# Altium PCB PCB1.pcbdoc
Units mil, origin at the board's own origin, x right, y up, seen from the top; angles counter-clockwise.
Board outline 1811.02 x 2047.24 mil, 2 copper layers (Top Layer, Bottom Layer), stack 38.583 mil thick; 38 components, 29 nets, 139 pads, 37 vias.
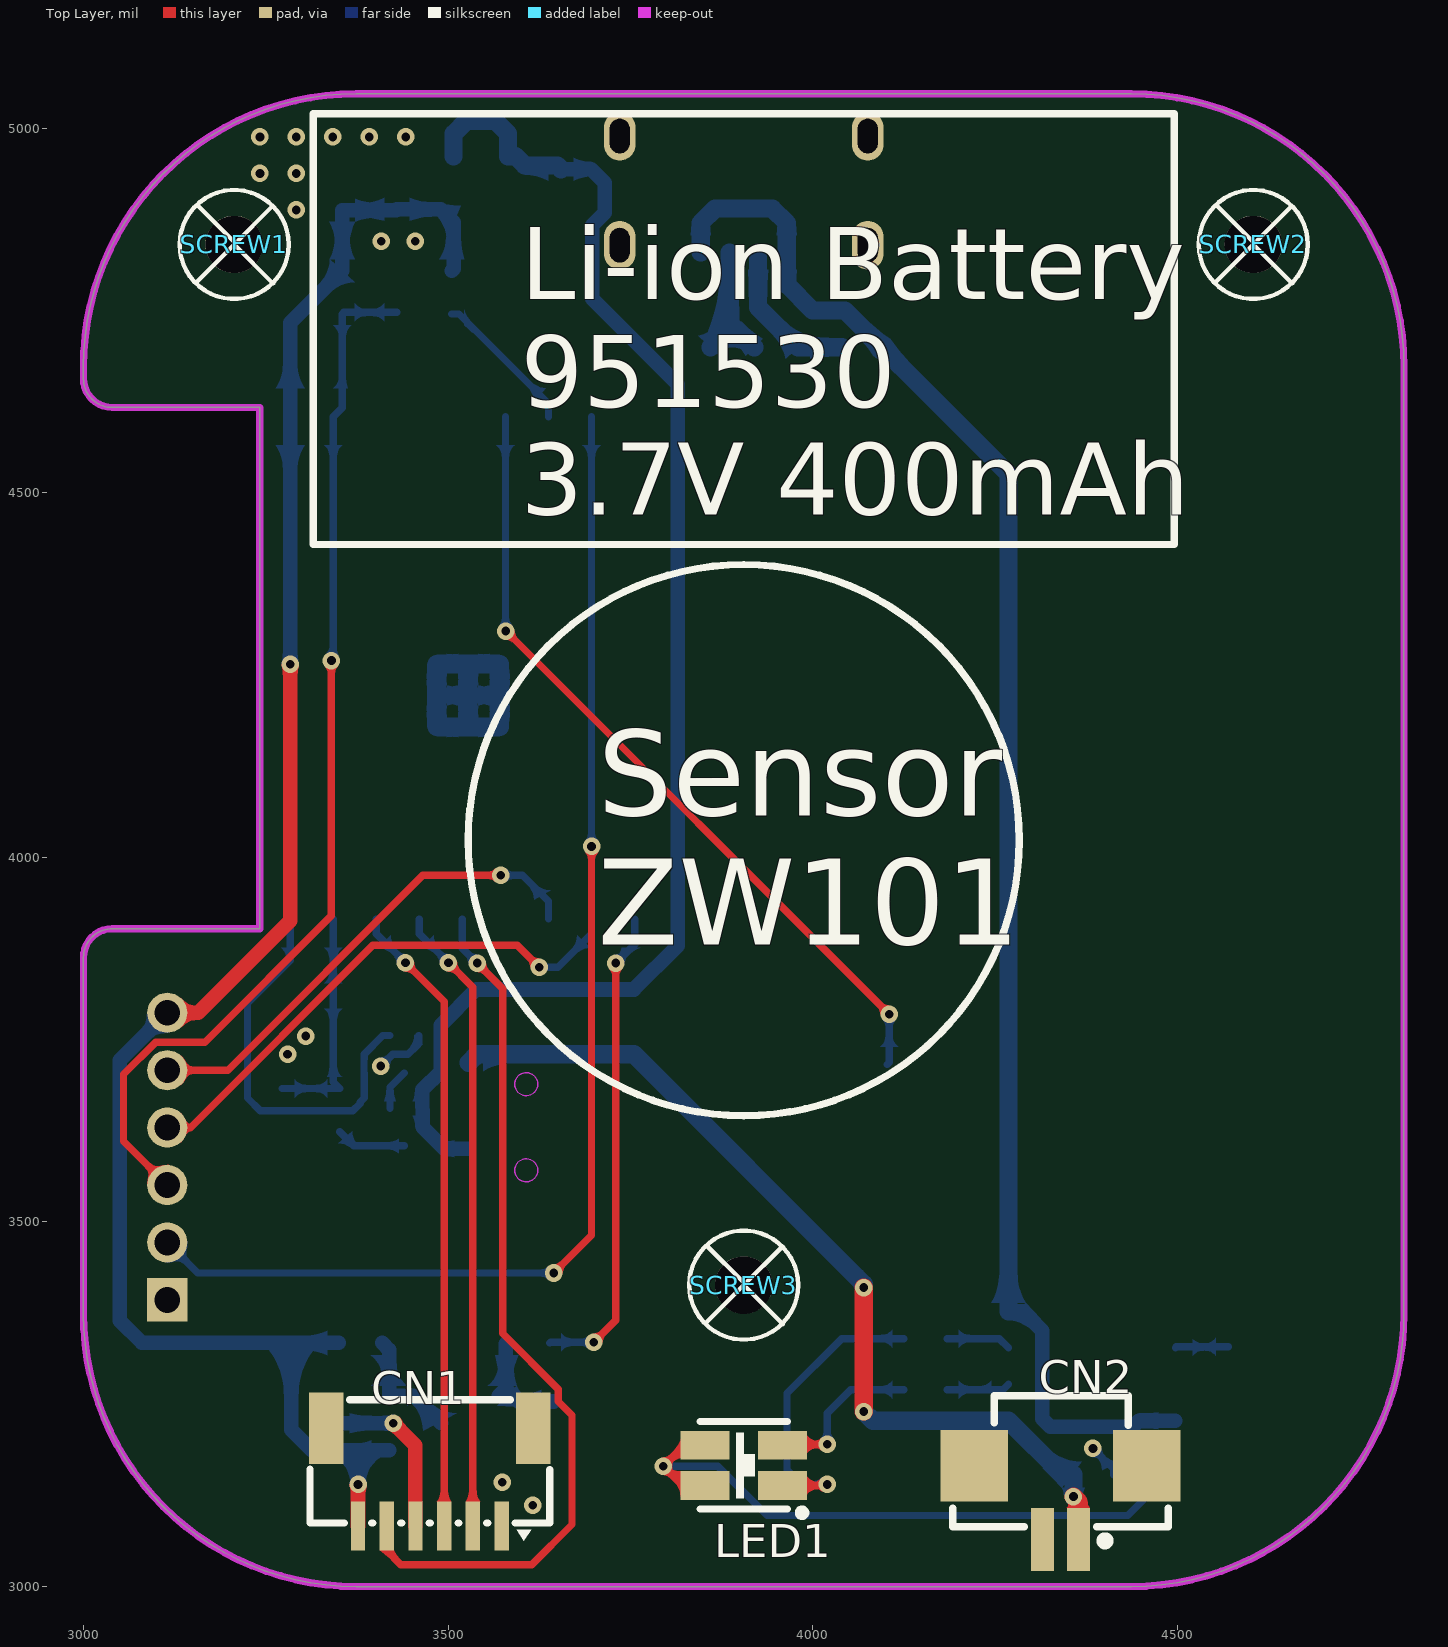
[diagram p0: Top Layer view]
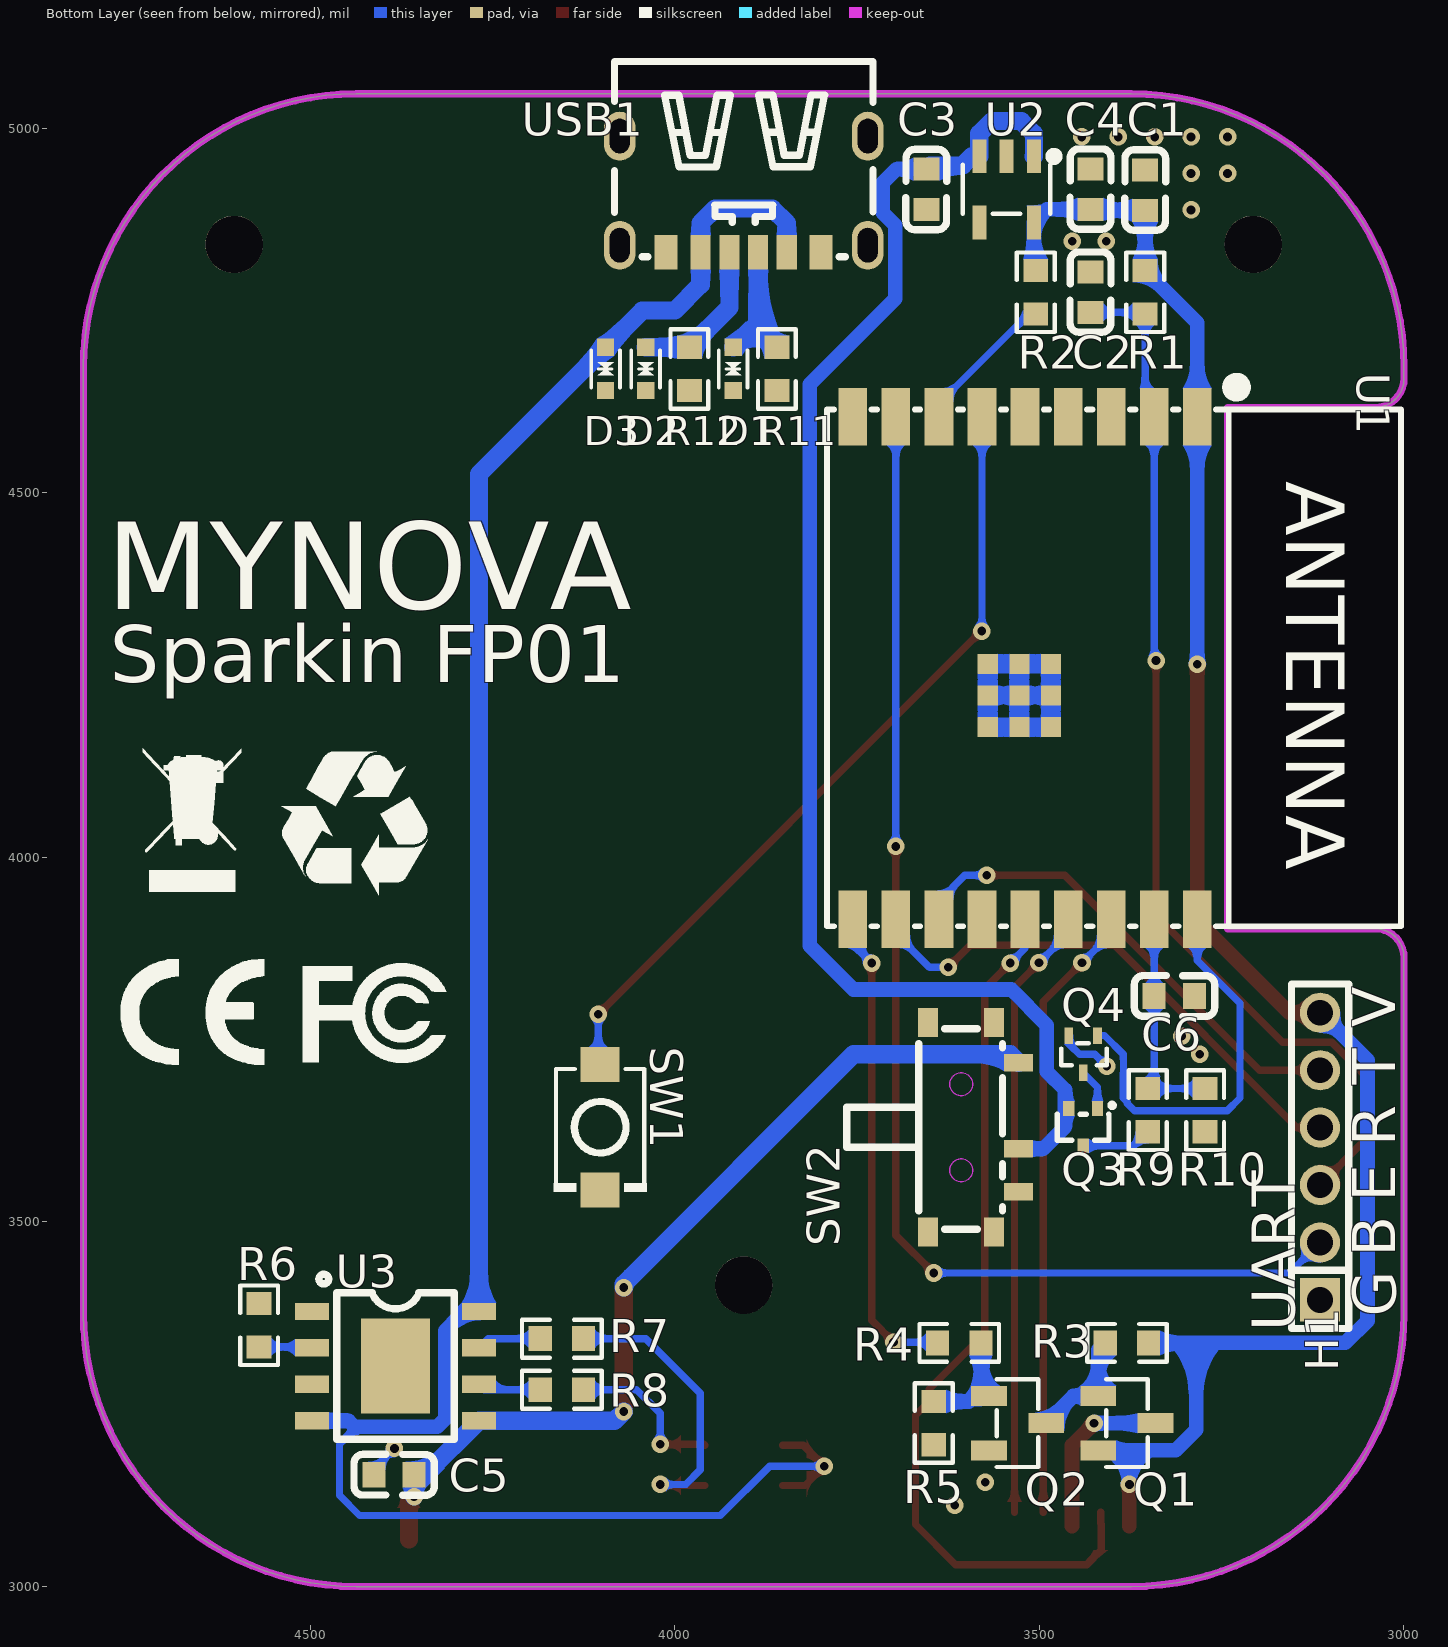
[diagram p1: Bottom Layer view, seen from below]

## Layer stack, top to bottom
Top Solder Mask Layer: solder mask 0.394, Dk 3.3
Top Layer: signal copper 1.378
Dielectric1: surface 35.827, FR4, Dk 4.5
Bottom Layer: signal copper 1.378
Bottom Solder Mask Layer: solder mask 0.394, Dk 3.3

## Board outline
3000,3374.02 ccw(c3374.02,3374.02) 3374.02,3000 4437.01,3000 ccw(c4437.01,3374.02) 4811.02,3374.02 4811.02,4673.23 ccw(c4437.01,4673.23) 4437.01,5047.24 3374.02,5047.24 ccw(c3374.02,4673.23) 3000,4673.23 3000,4656.47 ccw(c3039.37,4656.47) 3039.37,4617.1 3241.93,4617.1 3241.93,3902.15 3039.37,3902.15 ccw(c3039.37,3862.78) 3000,3862.78

## Design rules (kind name [scope] priority, off if disabled: settings)
BoardOutlineClearance copperThickness1oz [All] p0: genericclearance=10 ignorepadtopadclearanceinfootprint=FALSE except(0: Arc-SplitContinuation Track-SplitContinuation SMDPad-SplitContinuation THPad-SplitContinuation Via-SplitContinuation Fill-SplitContinuation Poly-SplitContinuation Region-SplitContinuation Text-SplitContinuation)
BoardOutlineClearance copperThickness2oz [All] p0: genericclearance=10 ignorepadtopadclearanceinfootprint=FALSE except(0: Arc-SplitContinuation Track-SplitContinuation SMDPad-SplitContinuation THPad-SplitContinuation Via-SplitContinuation Fill-SplitContinuation Poly-SplitContinuation Region-SplitContinuation Text-SplitContinuation)
BoardOutlineClearance Plane_innerPlane [All] p0: genericclearance=10 ignorepadtopadclearanceinfootprint=FALSE except(0: Arc-SplitContinuation Track-SplitContinuation SMDPad-SplitContinuation THPad-SplitContinuation Via-SplitContinuation Fill-SplitContinuation Poly-SplitContinuation Region-SplitContinuation Text-SplitContinuation)
BoardOutlineClearance Copper_copperRegion [All] p0: genericclearance=10 ignorepadtopadclearanceinfootprint=FALSE except(0: Arc-SplitContinuation Track-SplitContinuation SMDPad-SplitContinuation THPad-SplitContinuation Via-SplitContinuation Fill-SplitContinuation Poly-SplitContinuation Region-SplitContinuation Text-SplitContinuation)
BoardOutlineClearance otherClearance [All] p0: genericclearance=10 ignorepadtopadclearanceinfootprint=FALSE except(0: Arc-SplitContinuation Track-SplitContinuation SMDPad-SplitContinuation THPad-SplitContinuation Via-SplitContinuation Fill-SplitContinuation Poly-SplitContinuation Region-SplitContinuation Text-SplitContinuation)
Clearance copperThickness1oz [All] p1: gap=7 ignorepadtopadclearanceinfootprint=FALSE
Clearance copperThickness2oz [All] p1: gap=7 ignorepadtopadclearanceinfootprint=FALSE
Clearance Plane_innerPlane [All] p1: gap=7 ignorepadtopadclearanceinfootprint=FALSE
Clearance Copper_copperRegion [All] p1: gap=7 ignorepadtopadclearanceinfootprint=FALSE
Clearance otherClearance [All] p1: gap=7 ignorepadtopadclearanceinfootprint=FALSE
DiffPairsRouting differentialPair [All] p1: maxuncoupledlength=10 minlimit=5.9843 maxlimit=Infinity mostfreqgap=5.9843 toplayer_minwidth=5 toplayer_prefwidth=10 toplayer_maxwidth=100 bottomlayer_minwidth=5 bottomlayer_prefwidth=10 bottomlayer_maxwidth=100
PasteMaskExpansion pasteMaskExpansion [All] p1: expansion=0
PlaneConnect innerPlane [All] p1: planeconnectstyle=Relief reliefexpansion=20 reliefentries=4 reliefconductorwidth=10 reliefairgap=10
PolygonConnect copperRegion [All] p1: connectstyle=Direct reliefentries=4 reliefconductorwidth=10 polygonreliefangle="90 Angle" airgapwidth=10
RoutingVias viaSize [All] p1: viastyle="Through Hole" holewidth=12.0078 minholewidth=11.811 maxholewidth=248.0314 width=12.0078 minwidth=11.811 maxwidth=248.0314
SolderMaskExpansion solderMaskExpansion [All] p1: useseparateexpansions=TRUE expansion=2.0079 expansionbottom=2.0079
Width copperThickness1oz [All] p1: maxlimit=100 minlimit=5 preferedwidth=10
Width copperThickness2oz [All] p1: maxlimit=100 minlimit=8 preferedwidth=10

## Components (designator, comment, footprint, x,y, rotation, side; value= is the part's Value field where it differs from the comment)
C1 "" C0603 3355,4915 r270 bottom
C2 "" C0603 3430,4775 r270 bottom
C3 "" C0603 3655,4916.28 r90 bottom
C4 "" C0603 3430,4916.28 r270 bottom
C5 "" C0603 4385.18,3153.34 r0 bottom
C6 "" C0603 3315,3810 r0 bottom
CN1 "" CONN-SMD_6P-P1.00_MEGASTAR_ZX-SH1.0-6PWT 3475,3150 r180 top
CN2 "" CONN-SMD_2P-P1.25-HC-1.25-2PWT 4340,3115 r180 top
D1 "" SOD-523_L1.2-W0.8-LS1.6-BI 3920,4670 r270 bottom
D2 "" SOD-523_L1.2-W0.8-LS1.6-BI 4040,4670 r270 bottom
D3 "" SOD-523_L1.2-W0.8-LS1.6-BI 4095,4670 r270 bottom
H1 "" ? 3115,3590 r90 bottom
LED1 "" LED-SMD_4P-L3.2-W2.7-TL 3905.51,3166.22 r180 top
Q1 "" SOT-23-3_L2.9-W1.3-P1.90-LS2.4-BR 3379.97,3224.08 r0 bottom
Q2 "" SOT-23-3_L2.9-W1.3-P1.90-LS2.4-BR 3529.97,3224.08 r0 bottom
Q3 "" SOT-523-3_L1.6-W0.8-P1.00-LS1.6-BR 3440,3630 r90 bottom
Q4 "" SC-75-3_L1.6-W0.8-P1.00-LS1.7-BR 3440,3730 r90 bottom
R1 "" R0603 3355,4775 r90 bottom
R2 "" R0603 3505,4775 r90 bottom
R3 "" R0603 3379.97,3334.08 r0 bottom
R4 "" R0603 3609.97,3334.08 r180 bottom
R5 "" R0603 3644.97,3224.08 r90 bottom
R6 "" R0603 4570.18,3358.34 r270 bottom
R7 "" R0603 4155,3340 r0 bottom
R8 "" R0603 4155,3270 r0 bottom
R9 "" R0603 3351.53,3653.3 r270 bottom
R10 "" R0603 3272.79,3653.3 r90 bottom
R11 "" R0603 3860,4670 r270 bottom
R12 "" R0603 3980,4670 r270 bottom
SCREW1 "" M2螺丝 3206.69,4840.55 r0 top
SCREW2 "" M2螺丝 4604.33,4840.55 r0 top
SCREW3 "" M2螺丝 3905.51,3413.39 r0 top
SW1 "" SW-SMD_L3.9-W3.0-P4.45 4102.36,3629.92 r270 bottom
SW2 "" SW-SMD_MSK12C02G25-B 3590.55,3629.92 r90 bottom
U1 "" BULETM-SMD_ESPRESSIF_ESP32-C3-WROOM-02-N4-4MB 3519.68,4259.84 r270 bottom
U2 "" SOT-23-5_L3.0-W1.7-P0.95-LS2.8-BL 3545,4916.28 r0 bottom
U3 "" ESOP-8_L4.9-W3.9-P1.27-LS6.0-BL-EP 4383.06,3302.36 r270 bottom
USB1 "" TYPE-C-SMD_TYPE-C-6P_5 3905.51,4909.45 r0 bottom

## Footprints (in the part's own frame and the unit in brackets; to place one, negate y for a bottom-side part, rotate by r counter-clockwise, add the part's x,y. Pads: shape width x height; smd on the part's side, far side on the other; paste and mask are expansions set on the pad)
BULETM-SMD_ESPRESSIF_ESP32-C3-WROOM-02-N4-4MB [mm]
  rect 2x1 smd: 1(-8.75,6) 2(-8.75,4.5) 3(-8.75,3) 4(-8.75,1.5) 5(-8.75,0) 6(-8.75,-1.5) 7(-8.75,-3) 8(-8.75,-4.5) 9(-8.75,-6) 10(8.75,-6) 11(8.75,-4.5) 12(8.75,-3) 13(8.75,-1.5) 14(8.75,0) 15(8.75,1.5) 16(8.75,3) 17(8.75,4.5) 18(8.75,6)
  rect 0.7x0.7 smd: 19(-0.14,-1.3) 19(-0.14,-0.2) 19(-0.14,0.9) 19(0.96,-1.3) 19(0.96,-0.2) 19(0.96,0.9) 19(2.06,-1.3) 19(2.06,-0.2) 19(2.06,0.9)
  silkscreen extent -10.03,-6.9 9,13.1
C0603 [mm]
  rect 0.8x0.9 smd: 1(-0.7,0) 2(0.7,0)
  silkscreen extent -1.41,-0.71 1.39,0.72
CONN-SMD_2P-P1.25-HC-1.25-2PWT [mm]
  rect 0.8x2.2 smd: 1(-0.625,1.285) 2(0.625,1.285)
  rect 2.35x2.5 smd: 3(-3.005,-1.285) 4(3.005,-1.285)
  silkscreen extent -3.75,-3.73 3.75,1.48
CONN-SMD_6P-P1.00_MEGASTAR_ZX-SH1.0-6PWT [mm]
  rect 0.5x1.7 smd: 1(-2.5,1.7) 2(-1.5,1.7) 3(-0.5,1.7) 4(0.5,1.7) 5(1.5,1.7) 6(2.5,1.7)
  rect 1.2x2.5 smd: 7(3.6,-1.7) 8(-3.6,-1.7)
  silkscreen extent -4.17,-2.7 4.18,2.21
ESOP-8_L4.9-W3.9-P1.27-LS6.0-BL-EP [mm]
  rect 0.6x1.2 smd: 1(-1.905,-2.908) 2(-0.635,-2.908) 3(0.635,-2.908) 4(1.905,-2.908) 5(1.905,2.908) 6(0.635,2.908) 7(-0.635,2.908) 8(-1.905,2.908)
  rect 3.3x2.4 smd: 9(0,0)
  silkscreen extent -3.2,-2.67 2.55,2.05
LED-SMD_4P-L3.2-W2.7-TL [mm]
  rect 1.7x1 smd: 1(-1.35,0.7) 2(1.35,0.7) 3(-1.35,-0.7) 4(1.35,-0.7)
  silkscreen extent -2.16,-1.52 1.52,1.78
M2螺丝 [mm]
  round 2 hole 2: 1(0,0)
  silkscreen extent -1.9,-1.9 1.9,1.9
R0603 [mil]
  rect 31.75x34.02 smd: 1(-29.66,0) 2(29.66,0)
  silkscreen extent -55,-26 55,26
SC-75-3_L1.6-W0.8-P1.00-LS1.7-BR [mm]
  rect 0.585x0.301 smd: 1(0.643,-0.5) 2(0.643,0.5) 3(-0.643,0)
  silkscreen extent -0.38,-0.83 0.38,0.76
SOD-523_L1.2-W0.8-LS1.6-BI [mm]
  rect 0.6x0.6 smd: 1(-0.75,0) 2(0.75,0)
  silkscreen extent -0.65,-0.5 0.65,0.5
SOT-23-3_L2.9-W1.3-P1.90-LS2.4-BR [mm]
  rect 1.25x0.7 smd: 1(1,-0.95) 2(1,0.95) 3(-1,0)
  silkscreen extent -0.73,-1.53 0.73,1.53
SOT-23-5_L3.0-W1.7-P0.95-LS2.8-BL [mm]
  rect 0.49x1.157 smd: 1(-0.95,-1.154) 2(0,-1.154) 3(0.95,-1.154)
  rect 0.49x1.175 smd: 4(0.95,1.154) 5(-0.95,1.154)
  silkscreen extent -1.8,-1.29 1.53,0.85
SOT-523-3_L1.6-W0.8-P1.00-LS1.6-BR [mm]
  rect 0.51x0.4 smd: 1(0.65,-0.5) 2(0.65,0.5) 3(-0.65,0)
  silkscreen extent -0.45,-1.08 0.83,0.9
SW-SMD_L3.9-W3.0-P4.45 [mm]
  rect 1.23x1.36 smd: 1(-2.185,0) 2(2.185,0)
  silkscreen extent -2.03,-1.62 2.25,1.62
SW-SMD_MSK12C02G25-B [mm]
  rect 0.6x1 smd: 1(2.25,-1.575) 2(-0.75,-1.575) 3(-2.25,-1.575)
  rect 1x0.7 smd: 4(-3.65,-0.725) 4(-3.65,1.575) 5(3.65,-0.725) 5(3.65,1.575)
  Board Outline Layer circle w0.003: c-1.5,0.425 r0.4
  Board Outline Layer circle w0.003: c1.5,0.425 r0.4
  Board Outline Layer region: -1.5,0.825 -1.674,0.785 -1.813,0.674 -1.89,0.514 -1.89,0.336 -1.813,0.176 -1.674,0.065 -1.5,0.025 -1.5,0.025 -1.327,0.065 -1.187,0.176 -1.11,0.336 -1.11,0.514 -1.187,0.674 -1.327,0.785 -1.5,0.825
  Board Outline Layer region: -1.5,0.825 -1.674,0.785 -1.813,0.674 -1.89,0.514 -1.89,0.336 -1.813,0.176 -1.674,0.065 -1.5,0.025 -1.5,0.025 -1.327,0.065 -1.187,0.176 -1.11,0.336 -1.11,0.514 -1.187,0.674 -1.327,0.785 -1.5,0.825
  Board Outline Layer region: 1.5,0.825 1.326,0.785 1.187,0.674 1.11,0.514 1.11,0.336 1.187,0.176 1.326,0.065 1.5,0.025 1.5,0.025 1.673,0.065 1.813,0.176 1.89,0.336 1.89,0.514 1.813,0.674 1.673,0.785 1.5,0.825
  Board Outline Layer region: 1.5,0.825 1.326,0.785 1.187,0.674 1.11,0.514 1.11,0.336 1.187,0.176 1.326,0.065 1.5,0.025 1.5,0.025 1.673,0.065 1.813,0.176 1.89,0.336 1.89,0.514 1.813,0.674 1.673,0.785 1.5,0.825
  silkscreen extent -3.56,-1.02 3.43,4.41
TYPE-C-SMD_TYPE-C-6P_5 [mm]
  oval 1.1x1.7 hole 0.7 slot 1.2 at 90 deg: 7(-4.32,-2.025) 7(-4.32,1.775) 7(4.32,-2.025) 7(4.32,1.775)
  rect 0.7x1.2 smd: A5(-0.5,2.025) A9(1.5,2.025) B5(0.5,2.025) B9(-1.5,2.025)
  rect 0.8x1.2 smd: A12(2.7,2.025) B12(-2.7,2.025)
  silkscreen extent -4.5,-4.63 4.5,2.18
? [mm]
  round 1.4 hole 0.9: BOOT(-3,0) EN(-1,0) RXD(1,0) TXD(3,0) VCC(5,0)
  rect 1.524x1.4 hole 0.9: GND(-5,0)
  silkscreen extent -6,-1 6,1.02

## Via types
v1: diameter 24.02, hole 12.01, Top Layer to Bottom Layer, 37 vias

## Nets (pads, with @x,y where several pads share a name; then routed paths per layer and width w, separated by ;. In a path a pad name is that pad's centre, name@x,y a point inside that pad or via, vN(x,y) a via of type N, cw(c..) or ccw(c..) an arc to the next point about the centre after c; other vN are vias at no path point)
$1N767: R2.1 U1.7 | length 201.9
  Bottom Layer w10: R2.1 3515,4745.34 3637.8,4622.55 U1.7
$1N1560: R6.2 U3.2 | length 73.2
  Bottom Layer w10: U3.2 4498.89,3328.68 R6.2
$1N1561: R7.2 U3.7 | length 89.1
  Bottom Layer w10: R7.2 4255.92,3340 U3.7
$1N1563: R8.2 U3.6 | length 86.9
  Bottom Layer w10: R8.2 4261.2,3270 U3.6
$1N2417: Q3.3 R9.2 | length 96.4
  Bottom Layer w10: R9.2 3370.76,3604.41 Q3.3
$1N2420: Q3.1 Q4.3 | length 57
  Bottom Layer w10: Q3.1 3420.32,3684.72 Q4.3@3440.01,3704.41
$1N3697: D1.1 R11.1 USB1.A5 | length 185.7
  Bottom Layer w25: R11.1 3885.83,4725.49 ; USB1.A5 3885.83,4725.49 ; D1.1 3894.04,4725.49 3885.83,4725.49
$1N3704: D2.1 R12.1 USB1.B5 | length 212.8
  Bottom Layer w25: USB1.B5 3925.2,4754.46 R12.1 4039.86,4699.66 D2.1
$1N4315: Q1.1 Q2.3 R3.2 | length 163.4
  Bottom Layer w20: R3.2 3419.34,3324.37 Q1.1 3453.2,3261.48 Q2.3
$1N4319: Q2.1 R4.2 R5.2 | length 150.1
  Bottom Layer w20: Q2.1 Q2.1@3579.34,3271.48 ; R4.2 3579.34,3333.11 Q2.1@3579.34,3271.48 ; R5.2 3597.08,3253.74 Q2.1@3579.34,3271.48
$1N22263: LED1.3 R8.1 | length 223.2
  Top Layer w10: LED1.3 3959.88,3195 v1(4020,3195)
  Bottom Layer w10: v1(4020,3195) 4020,3237.52 4052.48,3270 R8.1
$1N22267: LED1.1 R7.1 | length 421.6
  Top Layer w10: LED1.1 4018.66,3138.66 v1(4020,3140)
  Bottom Layer w10: v1(4020,3140) 3985,3140 3965,3160 3965,3265 4040,3340 R7.1
+3.3V: C1.2 C4.2 CN1.6 H1.VCC Q1.2 R1.2 R2.2 R3.1 U1.1 U2.5 | length 2583.8
  Top Layer w20: H1.VCC@3115,3786.85 3157.47,3786.85 3283.47,3912.84 v1(3283.47,4265) ; CN1.6 v1(3376.57,3140)
  Bottom Layer w20: H1.VCC@3115,3786.85 3050,3721.85 3050,3364.39 3080.31,3334.08 3284.82,3334.08 ; v1(3283.47,4265) U1.1 3283.47,4733.12 R1.2 C1.2 3428.72,4887.44 C4.2 3489.74,4888.72 U2.5 3507.6,4807.26 R2.2 ; R3.1 3284.82,3334.08 ; v1(3376.57,3140) 3376.57,3186.57 3376.68,3186.68 ; Q1.2 3376.68,3186.68 ; 3284.82,3334.08 3285,3333.9 3285,3215 3313.32,3186.68 3376.68,3186.68
BAT+: C5.1 CN2.1 SW2.1 U3.5 | length 1267
  Top Layer w25: v1(4070,3240) v1(4070,3410) ; v1(4357.62,3123.34) 4364.6,3116.36 CN2.1
  Bottom Layer w25: SW2.1 3540.04,3730 3755,3730 4070,3415 v1(4070,3410) ; v1(4070,3240) 4082.64,3227.36 U3.5 4342.58,3153.34 C5.1 v1(4357.62,3123.34)
BAT_ADC: C6.2 R9.1 R10.2 U1.17 | length 314.8
  Bottom Layer w10: R10.2 R9.1 3342.56,3691.93 C6.2 U1.17@3342.56,3915.31
BAT_TEST: Q4.1 U1.18 | length 551.4
  Bottom Layer w10: U1.18 3283.47,3858.47 3225,3800 3225,3670 3242.5,3652.5 3369.49,3652.5 3379.52,3662.54 3379.52,3664.52 3385,3670 3385,3703.95 3384.74,3704.21 3384.74,3723.26 3385,3723.53 3385,3730 3410.59,3755.59 Q4.1@3420.32,3755.59
BOOT: H1.BOOT U1.8 | length 1743.2
  Top Layer w10: v1(3645,3430) 3696.84,3481.84 v1(3696.84,4015)
  Bottom Layer w10: H1.BOOT 3156.89,3430 v1(3645,3430) ; v1(3696.84,4015) U1.8
BTN-PAIR: SW1.1 U1.6 | length 1107.7
  Top Layer w10: v1(3579.21,4310.39) 3579.61,4310.39 v1(4105,3785)
  Bottom Layer w10: U1.6 3578.74,4310.87 v1(3579.21,4310.39) ; SW1.1 4105,3718.58 v1(4105,3785)
EN: C2.2 H1.EN R1.1 U1.2 | length 1459.3
  Top Layer w10: H1.EN 3055,3610.63 3055,3702.62 3099.04,3746.65 3166.65,3746.65 3340,3920 v1(3340,4270)
  Bottom Layer w10: v1(3340,4270) 3342.51,4272.52 U1.2 3355,4616.82 R1.1 3357.1,4747.44 C2.2
FP_ENABLE: R4.1 U1.10 | length 664.3
  Top Layer w10: v1(3700,3335) 3730,3365 v1(3730,3855)
  Bottom Layer w10: R4.1 3640.55,3335 v1(3700,3335) ; v1(3730,3855) 3755.91,3880.91 U1.10
FP_RX: CN1.2 U1.15 | length 844
  Top Layer w10: v1(3500.62,3855.35) 3534.05,3821.92 CN1.2@3534.05,3101.78
  Bottom Layer w10: U1.15 3460.62,3895.35 v1(3500.62,3855.35)
FP_TOUCH_OUT: CN1.5 U1.14 | length 1230.9
  Top Layer w10: CN1.5@3415.95,3101.78 3415.95,3086.78 3415,3085.84 3415,3050 3435,3030 3615,3030 3670,3085 3670,3235 3651.34,3253.66 3651.34,3270.69 3575,3347.03 3575,3820 v1(3540,3855)
  Bottom Layer w10: U1.14 3519.68,3875.32 v1(3540,3855)
FP_TX: CN1.3 U1.16 | length 852.1
  Top Layer w10: v1(3441.57,3855.35) 3494.68,3802.24 CN1.3@3494.68,3101.78
  Bottom Layer w10: U1.16 3401.57,3895.35 v1(3441.57,3855.35)
FP_VCC: CN1.4 Q1.3 | length 238
  Top Layer w20: v1(3425,3224.08) 3455.31,3193.77 CN1.4
  Bottom Layer w20: Q1.3 v1(3425,3224.08)
GND: C1.1 C2.1 C3.1 C4.1 C5.2 C6.1 CN1.1 CN1.7 CN1.8 CN2.2 D1.2 D2.2 D3.2 H1.GND Q2.2 Q4.2 R5.1 R6.1 R10.1 R11.2 R12.2 SW1.2 SW2.4 SW2.5 U1.9 U1.19 U2.2 U3.1 U3.3 U3.9 USB1.7 USB1.A12 USB1.B12 | length 643.2
  Bottom Layer w10: v1(3407.73,3713.74) 3423.99,3730 3445,3730 3459.68,3744.68 Q4.2@3459.68,3755.59 ; v1(4384.47,3189.47) 4412.74,3161.2 C5.2
  Bottom Layer w20: U1.19@3484.24,4222.05 3527.55,4222.05 U1.19@3570.86,4222.05
  Bottom Layer w25: U1.19@3527.55,4178.74 3484.24,4178.74 3484.24,4222.05 3484.24,4265.35 U1.19@3527.55,4265.35 ; U1.19@3527.55,4178.74 3570.86,4178.74 3570.86,4222.05 3570.86,4265.35 U1.19@3527.55,4265.35 ; U1.19@3527.55,4178.74 3527.55,4222.05 U1.19@3527.55,4265.35
  other v1: 3616.24,3111.61 3574.34,3142.91 3280,3730 3305,3755 3408.24,4845 3455,4845 3291.96,4887.99 3241.96,4937.99 3291.96,4937.99 3241.96,4987.99 3291.96,4987.99 3341.96,4987.99 3391.96,4987.99 3441.96,4987.99
RXD: H1.RXD U1.11 | length 736.9
  Top Layer w10: H1.RXD 3146.85,3629.37 3396.85,3879.37 3595,3879.37 v1(3625,3849.37)
  Bottom Layer w10: v1(3625,3849.37) 3650.86,3849.37 3696.84,3895.35 U1.11
TXD: H1.TXD U1.12 | length 672.7
  Top Layer w10: H1.TXD 3198.11,3708.11 3465.35,3975.35 v1(3572.24,3975.35)
  Bottom Layer w10: v1(3572.24,3975.35) 3602.24,3975.35 3637.8,3939.8 U1.12
VBUS: D3.1 LED1.2 LED1.4 U3.4 U3.8 USB1.A9 USB1.B9 | length 3133
  Top Layer w10: LED1.2 3821.34,3138.66 v1(3795,3165) 3823.78,3193.78 LED1.4
  Bottom Layer w10: v1(3795,3165) 3870,3165 3937.64,3097.36 4432.36,3097.36 4460,3125 4460,3194.92 4437.56,3217.36
  Bottom Layer w20: U3.8 4288.56,3377.36 4315,3350.92 4315,3230 4326,3219 4435.92,3219 4437.56,3217.36 4447.56,3227.36 U3.4
  Bottom Layer w25: USB1.B9 3846.46,4869.72 3866.46,4889.72 3944.57,4889.72 3964.57,4869.72 USB1.A9 3964.57,4785.43 4000,4750 4044.53,4750 D3.1 4268.56,4525.96 U3.8
VIN: C3.2 Q3.2 SW2.2 U2.1 U2.3 | length 1997.1
  Bottom Layer w20: SW2.2 3494.61,3600.39 3465.23,3629.77 3464.88,3681.09 3490,3706.2 3490,3770 3538.84,3818.84 3755,3818.84 3815,3878.84 3815,4648.84 3697.8,4766.04 3697.8,4866.96 3715,4884.17 3715,4925 3696.16,4943.84 C3.2
  Bottom Layer w25: U2.1 3507.32,4961.98 3507.32,4992.32 3525,5010 3565,5010 3582.4,4992.6 U2.3 3592.4,4961.7 3605.26,4948.84 3650,4948.84 C3.2
pads on no net: CN2.3 CN2.4 SCREW1.1 SCREW2.1 SCREW3.1 SW2.3 U1.3 U1.4 U1.5 U1.13 U2.4

## Polygon pours and split planes (outlines as drawn)
GND on Bottom Layer (solid, remove dead copper, pour order 2): 3000,5047.24 4811.02,5047.24 4811.02,3000 3000,3000
GND on Top Layer (solid, remove dead copper, pour order 0): 3000,5047.24 4811.02,5047.24 4811.02,3000 3000,3000

## Keep-outs
Board Outline Layer:
  the board outline again, w10

## Other copper
Top Layer:
  region net BAT+: 4352.1,3116.36 4377.1,3116.36 ccw(c4390.22,3116.36) 4380.35,3107.72 4348.86,3107.72 ccw(c4338.98,3116.36)
  region net +3.3V: 3152.52,3796.85 3152.52,3776.85 3149.62,3776.61 3146.95,3775.93 3144.47,3774.88 3142.12,3773.52 3139.86,3771.9 3137.66,3770.1 3133.23,3766.18 3133.23,3807.52 3137.66,3803.6 3139.86,3801.8 3142.12,3800.18 3144.47,3798.82 3146.95,3797.77 3149.62,3797.09
  region net TXD: 3152.52,3713.11 3152.52,3703.11 3150.45,3703.02 3148.66,3702.76 3147.1,3702.34 3145.76,3701.76 3144.59,3701.05 3143.55,3700.22 3141.76,3698.21 3138.33,3693.19 3136.12,3690.36 3134.78,3688.91 3133.23,3687.44 3133.23,3728.78 3134.78,3727.31 3136.12,3725.86 3138.33,3723.03 3141.76,3718.01 3143.55,3716 3144.59,3715.17 3145.76,3714.46 3147.1,3713.88 3148.66,3713.46 3150.45,3713.2
  region net RXD: 3146.85,3634.37 3146.85,3624.37 3145.77,3624.24 3144.75,3623.86 3143.78,3623.26 3142.85,3622.47 3141.11,3620.45 3139.49,3618 3136.4,3612.8 3134.85,3610.5 3133.23,3608.7 3133.23,3650.04 3134.85,3648.24 3136.4,3645.94 3139.49,3640.74 3141.11,3638.3 3142.85,3636.27 3143.78,3635.48 3144.75,3634.88 3145.77,3634.5
  region net EN: 3084.93,3573.62 3092.01,3580.7 3093.53,3579.3 3094.99,3578.21 3096.38,3577.41 3097.74,3576.87 3099.07,3576.54 3100.39,3576.4 3103.07,3576.55 3109.05,3577.67 3112.61,3578.11 3114.59,3578.19 3116.73,3578.13 3087.5,3548.9 3087.44,3551.04 3087.52,3553.02 3087.96,3556.58 3089.08,3562.56 3089.23,3565.24 3089.09,3566.56 3088.76,3567.89 3088.22,3569.25 3087.42,3570.64 3086.34,3572.1
  region net FP_TX: 3489.68,3131.53 3499.68,3131.53 ccw(c3525.36,3131.53) 3504.52,3116.53 3484.84,3116.53 ccw(c3464.05,3131.53)
  region net FP_RX: 3529.05,3131.53 3539.05,3131.53 ccw(c3564.73,3131.53) 3543.89,3116.53 3524.21,3116.53 ccw(c3503.42,3131.53)
  region net FP_TOUCH_OUT: 3434.73,3037.34 3417.82,3040.11 ccw(c3366.72,2989.01) 3406.1,3049.61 3425.78,3049.61 ccw(c3469.48,3072.09)
  region net $1N22267: 4007.12,3143.66 4007.12,3133.66 ccw(c4007.12,3114.91) 3992.12,3126.16 3992.12,3151.16 ccw(c4007.12,3162.41)
  region net VBUS: 3813.6,3139.33 3803.21,3163.86 ccw(c3816.81,3177.46) 3818.9,3158.35 3818.9,3123.42 ccw(c3792.39,3123.42)
  region net $1N22263: 4007.12,3200 4007.12,3190 ccw(c4007.12,3171.25) 3992.12,3182.5 3992.12,3207.5 ccw(c4007.12,3218.75)
  region net VBUS: 3805.58,3168.51 3811.01,3188.08 ccw(c3788.93,3210.16) 3818.9,3201.4 3818.9,3176.4 ccw(c3827.66,3146.43)
  region net BAT+: 4377.1,3109.42 4352.1,3106.34 4351.94,3108.56 4351.43,3110.86 4350.54,3113 4349.94,3113.93 4349.24,3114.74 4368.29,3117.83 4367.92,3116.91 4367.86,3116.16 4368.06,3115.56 4368.48,3115.09 4369.85,3114.4 4371.65,3113.88 4373.58,3113.33 4375.33,3112.54 4376.05,3111.99 4376.61,3111.31 4376.97,3110.46
  region net FP_RX: 3515.72,3847.33 3508.65,3840.26 3507.78,3841 3506.8,3841.62 3504.59,3842.54 3502.22,3843.1 3499.87,3843.37 3512.61,3856.1 3512.87,3853.76 3513.43,3851.39 3514.36,3849.18 3514.98,3848.2
  region net FP_TX: 3456.67,3847.33 3449.6,3840.26 3448.73,3841 3447.75,3841.62 3445.54,3842.54 3443.17,3843.1 3440.82,3843.37 3453.56,3856.1 3453.82,3853.76 3454.38,3851.39 3455.31,3849.18 3455.93,3848.2
  region net RXD: 3609.91,3857.39 3616.98,3864.47 3617.84,3863.72 3618.83,3863.1 3621.03,3862.18 3623.41,3861.62 3625.75,3861.35 3613.02,3848.62 3612.75,3850.96 3612.19,3853.34 3611.27,3855.54 3610.65,3856.53
  region net TXD: 3555.89,3970.35 3555.89,3980.35 3557.03,3980.44 3558.17,3980.7 3560.38,3981.6 3562.45,3982.89 3564.3,3984.36 3564.3,3966.35 3562.45,3967.82 3560.38,3969.1 3558.17,3970.01 3557.03,3970.26
  region net FP_TOUCH_OUT: 3555.1,3846.98 3548.02,3839.9 3547.16,3840.65 3546.17,3841.27 3543.97,3842.19 3541.59,3842.75 3539.25,3843.02 3551.98,3855.75 3552.25,3853.41 3552.81,3851.03 3553.73,3848.83 3554.35,3847.84
  region net FP_ENABLE: 3735,3838.65 3725,3838.65 3724.91,3839.79 3724.66,3840.92 3723.75,3843.14 3722.47,3845.21 3720.99,3847.06 3739.01,3847.06 3737.53,3845.21 3736.25,3843.14 3735.34,3840.92 3735.09,3839.79
  region net FP_ENABLE: 3708.02,3350.1 3715.1,3343.02 3714.35,3342.16 3713.73,3341.17 3712.81,3338.97 3712.25,3336.59 3711.98,3334.25 3699.25,3346.98 3701.59,3347.25 3703.97,3347.81 3706.17,3348.73 3707.16,3349.35
  region net BTN-PAIR: 3594.36,4302.72 3587.58,4295.35 3586.71,4296.09 3585.72,4296.71 3583.49,4297.63 3581.09,4298.17 3578.74,4298.4 3591.18,4311.42 3591.48,4309.09 3592.06,4306.74 3592.99,4304.56 3593.61,4303.58
  region net BTN-PAIR: 4089.9,3793.02 4096.98,3800.1 4097.84,3799.35 4098.83,3798.73 4101.03,3797.81 4103.41,3797.25 4105.75,3796.98 4093.02,3784.25 4092.75,3786.59 4092.19,3788.97 4091.27,3791.17 4090.65,3792.16
  region net +3.3V: 3293.47,4250.59 3273.47,4250.59 3273.38,4253.24 3273.15,4255.74 3272.46,4260.12 3271.77,4263.34 3271.46,4265 3295.47,4265 3295.16,4263.34 3294.47,4260.12 3293.78,4255.74 3293.55,4253.24
  region net EN: 3345,4253.65 3335,4253.65 3334.91,4254.79 3334.66,4255.92 3333.75,4258.14 3332.47,4260.21 3330.99,4262.06 3349.01,4262.06 3347.53,4260.21 3346.25,4258.14 3345.34,4255.92 3345.09,4254.79
  region net BOOT: 3701.84,3998.65 3691.84,3998.65 3691.76,3999.79 3691.5,4000.92 3690.59,4003.14 3689.31,4005.21 3687.84,4007.06 3705.85,4007.06 3704.38,4005.21 3703.1,4003.14 3702.19,4000.92 3701.93,3999.79
  region net BOOT: 3653.02,3445.1 3660.1,3438.02 3659.35,3437.16 3658.73,3436.17 3657.81,3433.97 3657.25,3431.59 3656.98,3429.25 3644.25,3441.98 3646.59,3442.25 3648.97,3442.81 3651.17,3443.73 3652.16,3444.35
  region net FP_VCC: 3442.26,3220.96 3428.12,3206.82 3426.19,3208.63 3424.25,3210.24 3420.67,3212.85 3417.9,3214.64 3416.51,3215.59 3433.49,3232.57 3434.44,3231.17 3436.23,3228.41 3438.84,3224.82 3440.45,3222.89
  region net +3.3V: 3386.57,3125.59 3366.57,3125.59 3366.48,3128.24 3366.26,3130.74 3365.57,3135.12 3364.88,3138.34 3364.56,3140 3388.58,3140 3388.26,3138.34 3387.57,3135.12 3386.88,3130.74 3386.66,3128.24
  region net $1N22263: 4003.65,3190 4003.65,3200 4004.79,3200.09 4005.92,3200.34 4008.14,3201.25 4010.21,3202.53 4012.06,3204.01 4012.06,3185.99 4010.21,3187.47 4008.14,3188.75 4005.92,3189.66 4004.79,3189.91
  region net $1N22267: 4004.71,3133.66 4002.7,3143.66 4003.83,3143.76 4004.98,3144.04 4007.27,3145.04 4009.37,3146.45 4011.1,3148.06 4013.11,3130.16 4011.17,3131.45 4009.12,3132.57 4006.95,3133.36 4005.84,3133.58
  region net VBUS: 3810.1,3156.98 3803.02,3149.9 3802.16,3150.65 3801.17,3151.27 3798.97,3152.19 3796.59,3152.75 3794.25,3153.02 3806.98,3165.75 3807.25,3163.41 3807.81,3161.03 3808.73,3158.83 3809.35,3157.84
  region net VBUS: 3803.02,3180.1 3810.1,3173.02 3809.35,3172.16 3808.73,3171.17 3807.81,3168.97 3807.25,3166.59 3806.98,3164.25 3794.25,3176.98 3796.59,3177.25 3798.97,3177.81 3801.17,3178.73 3802.16,3179.35
Bottom Layer:
  region net +3.3V: 3365,4841.69 3345,4841.69 ccw(c3282.83,4841.69) 3337.28,4871.69 3372.72,4871.69 ccw(c3427.17,4841.69)
  region net +3.3V: 3402.72,4897.44 3402.72,4877.44 ccw(c3402.72,4796.28) 3372.72,4871.69 3372.72,4903.19 ccw(c3402.72,4978.6)
  region net EN: 3397.28,4742.44 3397.28,4752.44 ccw(c3397.28,4771.19) 3412.28,4759.94 3412.28,4734.94 ccw(c3397.28,4723.69)
  region net VIN: 3605.26,4936.34 3605.26,4961.34 ccw(c3637.28,5253.14) 3637.28,4959.59 3637.28,4928.1 ccw(c3605.26,4870.05)
  region net VIN: 3696.16,4953.84 3696.16,4933.84 ccw(c3696.16,4883.17) 3672.72,4928.1 3672.72,4959.59 ccw(c3696.16,5004.51)
  region net GND: 4391.69,3175.18 4404.65,3176.36 ccw(c4420.56,3197.58) 4420.56,3171.06 4396.99,3159.27 ccw(c4370.48,3159.27)
  region net BAT+: 4315.73,3162.51 4329.28,3184.32 ccw(c4369.05,3237.35) 4369.05,3171.06 4341.87,3135.63 ccw(c3369.01,2215.8)
  region net BAT+: 4370.12,3123.34 4345.12,3123.34 ccw(c4320.27,3123.34) 4341.87,3135.63 4373.37,3135.63 ccw(c4394.97,3123.34)
  region net BAT_ADC: 3347.56,3777.28 3337.56,3777.28 ccw(c3318.81,3777.28) 3330.06,3792.28 3355.06,3792.28 ccw(c3366.31,3777.28)
  region net BAT_ADC: 3337.56,3842.72 3347.56,3842.72 ccw(c3366.31,3842.72) 3355.06,3827.72 3330.06,3827.72 ccw(c3318.81,3842.72)
  region net +3.3V: 3095.54,3753.25 3081.4,3767.39 3083.28,3769.61 3084.69,3771.97 3085.7,3774.48 3086.4,3777.1 3086.85,3779.84 3087.13,3782.67 3087.5,3788.58 3116.73,3759.35 3110.82,3758.98 3107.99,3758.7 3105.25,3758.25 3102.63,3757.55 3100.13,3756.54 3097.76,3755.13
  region net BOOT: 3145.07,3448.89 3138,3441.82 3136.47,3443.22 3135.01,3444.31 3133.62,3445.11 3132.26,3445.65 3130.93,3445.98 3129.61,3446.12 3126.93,3445.97 3120.95,3444.85 3117.39,3444.41 3115.41,3444.33 3113.27,3444.39 3142.51,3473.62 3142.56,3471.48 3142.48,3469.5 3142.04,3465.94 3140.92,3459.96 3140.77,3457.28 3140.91,3455.96 3141.24,3454.63 3141.78,3453.27 3142.58,3451.88 3143.67,3450.42
  region net $1N2417: 3417.12,3599.41 3417.12,3609.41 ccw(c3417.12,3634.25) 3432.12,3614.45 3432.12,3594.37 ccw(c3417.12,3574.57)
  region net $1N2420: 3415.32,3680.63 3425.32,3680.63 ccw(c3465.9,3680.63) 3428.19,3665.63 3412.44,3665.63 ccw(c3374.73,3680.63)
  region net VIN: 3454.88,3681.02 3474.88,3681.15 ccw(c3487.39,3665.77) 3467.56,3665.63 3451.81,3665.63 ccw(c3416.12,3680.75)
  region net VIN: 3475.23,3629.84 3455.23,3629.7 ccw(c3415.55,3629.43) 3451.81,3645.55 3467.56,3645.55 ccw(c3487.77,3645.69)
  region net +3.3V: 3341.42,4776.94 3326.15,4789.95 ccw(c3292.58,4820.54) 3337.99,4820.54 3372.01,4788.78 ccw(c3372.01,4743.37)
  region net +3.3V: 3345,4850.54 3365,4850.54 ccw(c3432.72,4850.54) 3372.01,4820.54 3337.99,4820.54 ccw(c3277.28,4850.54)
  region net EN: 3360,4714.46 3350,4714.46 ccw(c3331.25,4714.46) 3342.5,4729.46 3367.5,4729.46 ccw(c3378.75,4714.46)
  region net EN: 3387.01,4752.44 3387.01,4742.44 ccw(c3387.01,4723.69) 3372.01,4734.94 3372.01,4759.94 ccw(c3387.01,4771.19)
  region net $1N1561: 4215.54,3345 4215.54,3335 ccw(c4215.54,3316.25) 4200.54,3327.5 4200.54,3352.5 ccw(c4215.54,3363.75)
  region net $1N22267: 4094.46,3335 4094.46,3345 ccw(c4094.46,3363.75) 4109.46,3352.5 4109.46,3327.5 ccw(c4094.46,3316.25)
  region net $1N1563: 4215.54,3275 4215.54,3265 ccw(c4215.54,3246.25) 4200.54,3257.5 4200.54,3282.5 ccw(c4215.54,3293.75)
  region net $1N22263: 4094.46,3265 4094.46,3275 ccw(c4094.46,3293.75) 4109.46,3282.5 4109.46,3257.5 ccw(c4094.46,3246.25)
  region net +3.3V: 3497.6,4850.54 3517.6,4850.54 ccw(c3621.89,4850.54) 3522.01,4820.54 3487.99,4820.54 ccw(c3445.96,4850.54)
  region net $1N767: 3529.9,4737.51 3533.51,4719.76 ccw(c3470.44,4656.68) 3522.01,4729.46 3522.01,4750.83 ccw(c3551.98,4759.59)
  region net BTN-PAIR: 4100,3755.15 4110,3755.15 ccw(c4128.75,3755.15) 4117.5,3740.15 4092.5,3740.15 ccw(c4081.25,3755.15)
  region net BAT+: 3585.73,3742.5 3585.73,3717.5 ccw(c3585.73,3647.05) 3548.23,3706.69 3548.23,3730.31 ccw(c3548.23,3794.1)
  region net VIN: 3494.61,3590.39 3494.61,3610.39 ccw(c3494.61,3667.34) 3508.86,3612.2 3508.86,3588.58 ccw(c3494.61,3533.44)
  region net +3.3V: 3273.47,4673.7 3293.47,4673.7 ccw(c3344.77,4673.7) 3303.15,4643.7 3263.78,4643.7 ccw(c3222.16,4673.7)
  region net +3.3V: 3293.47,4534.96 3273.47,4534.96 ccw(c3222.16,4534.96) 3263.78,4564.96 3303.15,4564.96 ccw(c3344.77,4534.96)
  region net EN: 3350,4658.7 3360,4658.7 ccw(c3412.24,4658.7) 3362.2,4643.7 3342.5,4643.7 ccw(c3331.25,4658.7)
  region net EN: 3347.51,4549.96 3337.51,4549.96 ccw(c3318.76,4549.96) 3330.01,4564.96 3355.01,4564.96 ccw(c3366.26,4549.96)
  region net BTN-PAIR: 3583.74,4549.96 3573.74,4549.96 ccw(c3554.99,4549.96) 3566.24,4564.96 3591.24,4564.96 ccw(c3602.49,4549.96)
  region net $1N767: 3612.81,4640.46 3618.41,4649.01 ccw(c3634.32,4670.22) 3634.32,4643.7 3618.11,4624.55 ccw(c3591.59,4624.55)
  region net BOOT: 3701.84,4549.96 3691.84,4549.96 ccw(c3673.09,4549.96) 3684.34,4564.96 3709.34,4564.96 ccw(c3720.59,4549.96)
  region net FP_ENABLE: 3750.16,3868.09 3730.59,3862.66 ccw(c3708.51,3884.74) 3738.48,3875.98 3763.48,3875.98 ccw(c3772.24,3846.01)
  region net RXD: 3679.24,3870.68 3671.86,3877.44 ccw(c3650.64,3893.35) 3677.16,3893.35 3695.15,3875.98 ccw(c3695.15,3849.47)
  region net TXD: 3612.81,3957.72 3624.64,3960.03 ccw(c3640.55,3981.24) 3640.55,3954.72 3618.11,3941.81 ccw(c3591.59,3941.81)
  region net FP_TOUCH_OUT: 3524.68,3875.32 3514.68,3875.32 ccw(c3507.18,3833.51) 3507.18,3875.98 3532.18,3875.98 ccw(c3532.18,3833.51)
  region net FP_RX: 3485.61,3877.44 3478.23,3870.68 ccw(c3462.32,3849.47) 3462.32,3875.98 3480.31,3893.35 ccw(c3506.83,3893.35)
  region net FP_TX: 3426.56,3877.44 3419.18,3870.68 ccw(c3403.27,3849.47) 3403.27,3875.98 3421.26,3893.35 ccw(c3447.78,3893.35)
  region net BAT_ADC: 3347.56,3860.98 3337.56,3860.98 ccw(c3318.81,3860.98) 3330.06,3875.98 3355.06,3875.98 ccw(c3366.31,3860.98)
  region net BAT_TEST: 3288.47,3860.98 3278.47,3860.98 ccw(c3259.72,3860.98) 3270.97,3875.98 3295.97,3875.98 ccw(c3307.22,3860.98)
  region net GND: 3496.74,4222.05 3471.74,4222.05 ccw(c3130.56,4222.05) 3470.47,4251.57 3498.02,4251.57 ccw(c3837.93,4222.05)
  region net GND: 3527.55,4277.85 3527.55,4252.85 ccw(c3527.56,3911.43) 3498.02,4251.57 3498.02,4279.13 ccw(c3527.56,4619.27)
  region net GND: 3540.05,4222.05 3515.05,4222.05 ccw(c3173.87,4222.05) 3513.78,4251.57 3541.33,4251.57 ccw(c3881.24,4222.05)
  region net GND: 3570.86,4277.85 3570.86,4252.85 ccw(c3570.87,3911.43) 3541.33,4251.57 3541.33,4279.13 ccw(c3570.87,4619.27)
  region net GND: 3484.24,4252.85 3484.24,4277.85 ccw(c3484.24,4619.27) 3513.78,4279.13 3513.78,4251.57 ccw(c3484.24,3911.43)
  region net GND: 3583.36,4222.05 3558.36,4222.05 ccw(c3217.18,4222.05) 3557.09,4251.57 3584.64,4251.57 ccw(c3924.55,4222.05)
  region net GND: 3527.55,4252.85 3527.55,4277.85 ccw(c3527.55,4619.27) 3557.09,4279.13 3557.09,4251.57 ccw(c3527.55,3911.43)
  region net GND: 3471.74,4265.35 3496.74,4265.35 ccw(c3837.93,4265.35) 3498.02,4235.83 3470.47,4235.83 ccw(c3130.56,4265.35)
  region net GND: 3496.74,4178.74 3471.74,4178.74 ccw(c3130.33,4178.74) 3470.47,4208.27 3498.02,4208.27 ccw(c3838.16,4178.74)
  region net GND: 3527.55,4232.05 3527.55,4212.05 ccw(c3527.55,4094.8) 3498.02,4208.27 3498.02,4235.83 ccw(c3527.55,4349.31)
  region net GND: 3515.05,4265.35 3540.05,4265.35 ccw(c3881.24,4265.35) 3541.33,4235.83 3513.78,4235.83 ccw(c3173.87,4265.35)
  region net GND: 3540.05,4178.74 3515.05,4178.74 ccw(c3173.64,4178.74) 3513.78,4208.27 3541.33,4208.27 ccw(c3881.47,4178.74)
  region net GND: 3570.86,4232.05 3570.86,4212.05 ccw(c3570.86,4094.8) 3541.33,4208.27 3541.33,4235.83 ccw(c3570.86,4349.31)
  region net GND: 3484.24,4212.05 3484.24,4232.05 ccw(c3484.25,4349.31) 3513.78,4235.83 3513.78,4208.27 ccw(c3484.25,4094.8)
  region net GND: 3558.36,4265.35 3583.36,4265.35 ccw(c3924.55,4265.35) 3584.64,4235.83 3557.09,4235.83 ccw(c3217.18,4265.35)
  region net GND: 3583.36,4178.74 3558.36,4178.74 ccw(c3216.95,4178.74) 3557.09,4208.27 3584.64,4208.27 ccw(c3924.78,4178.74)
  region net GND: 3527.55,4212.05 3527.55,4232.05 ccw(c3527.56,4349.31) 3557.09,4235.83 3557.09,4208.27 ccw(c3527.56,4094.8)
  region net GND: 3527.55,4166.24 3527.55,4191.24 ccw(c3527.55,4532.66) 3557.09,4192.52 3557.09,4164.96 ccw(c3527.55,3824.82)
  region net GND: 3558.36,4222.05 3583.36,4222.05 ccw(c3924.78,4222.05) 3584.64,4192.52 3557.09,4192.52 ccw(c3216.95,4222.05)
  region net GND: 3570.86,4191.24 3570.86,4166.24 ccw(c3570.87,3824.82) 3541.33,4164.96 3541.33,4192.52 ccw(c3570.87,4532.66)
  region net GND: 3515.05,4222.05 3540.05,4222.05 ccw(c3881.47,4222.05) 3541.33,4192.52 3513.78,4192.52 ccw(c3173.64,4222.05)
  region net GND: 3484.24,4166.24 3484.24,4191.24 ccw(c3484.24,4532.66) 3513.78,4192.52 3513.78,4164.96 ccw(c3484.24,3824.82)
  region net GND: 3471.74,4222.05 3496.74,4222.05 ccw(c3838.16,4222.05) 3498.02,4192.52 3470.47,4192.52 ccw(c3130.33,4222.05)
  region net GND: 3527.55,4191.24 3527.55,4166.24 ccw(c3527.56,3824.82) 3498.02,4164.96 3498.02,4192.52 ccw(c3527.56,4532.66)
  region net +3.3V: 3486.06,4878.26 3496.81,4895.79 ccw(c3517.25,5010.82) 3517.25,4893.99 3497.95,4847.73 ccw(c3452.83,4847.73)
  region net $1N1560: 4536.18,3333.68 4536.18,3323.68 ccw(c4536.18,3304.93) 4521.18,3316.18 4521.18,3339.17 ccw(c4536.18,3356.93)
  region net VBUS: 4447.56,3217.36 4447.56,3237.36 ccw(c4447.56,3430.37) 4473.94,3239.17 4473.94,3215.55 ccw(c4447.56,3024.35)
  region net $1N1563: 4229.94,3265 4229.94,3275 ccw(c4229.94,3293.75) 4244.94,3282.5 4244.94,3265.55 ccw(c4244.94,3059.42)
  region net VBUS: 4256.06,3426.67 4281.06,3426.67 ccw(c4349.84,3426.67) 4292.18,3389.17 4244.94,3389.17 ccw(c4187.28,3426.67)
  region net VBUS: 4312.75,3367.31 4296.84,3354.94 ccw(c4265.02,3312.51) 4265.02,3365.55 4292.18,3389.17 ccw(c4661.68,3716.24)
  region net VBUS: 3833.96,4869.72 3858.96,4869.72 ccw(c3964.42,4869.72) 3860.24,4853.35 3832.68,4853.35 ccw(c3728.5,4869.72)
  region net $1N3697: 3898.33,4768.6 3873.33,4768.6 ccw(c3323.15,4768.6) 3872.05,4806.1 3899.61,4806.1 ccw(c4448.5,4768.6)
  region net $1N3704: 3937.7,4768.6 3912.7,4768.6 ccw(c3362.52,4768.6) 3911.42,4806.1 3938.98,4806.1 ccw(c4487.87,4768.6)
  region net VBUS: 3952.07,4869.72 3977.07,4869.72 ccw(c4082.53,4869.72) 3978.35,4853.35 3950.79,4853.35 ccw(c3846.61,4869.72)
  region net VBUS: 3977.07,4785.43 3952.07,4785.43 ccw(c3784.49,4785.43) 3950.79,4806.1 3978.35,4806.1 ccw(c4144.64,4785.43)
  region net $1N4319: 3604.15,3260.81 3590.01,3246.67 ccw(c3567.76,3007.34) 3567.76,3247.7 3593.95,3275.26 ccw(c3641.01,3297.67)
  region net $1N4319: 3569.34,3305.26 3589.34,3305.26 ccw(c3689.33,3305.26) 3593.95,3275.26 3554.34,3275.26 ccw(c3531.84,3305.26)
  region net $1N4315: 3455.39,3245.15 3480.35,3248.47 ccw(c3512.17,3290.89) 3512.17,3237.86 3465.99,3213.33 ccw(c3412.96,3213.33)
  region net $1N4315: 3429.34,3287.07 3409.34,3287.07 ccw(c3371.84,3287.07) 3394.34,3317.07 3425.5,3317.07 ccw(c3544.78,3317.07)
  region net +3.3V: 3304.43,3324.08 3304.43,3344.08 ccw(c3304.43,3411.8) 3334.43,3351.09 3334.43,3317.07 ccw(c3304.43,3256.36)
  region net $1N3697: 3876.99,4734.33 3894.67,4716.65 ccw(c3940.43,4670.88) 3877.01,4683.78 3842.99,4715.54 ccw(c3827.38,4783.94)
  region net $1N3704: 4034.51,4712.16 4034.51,4687.16 ccw(c4034.51,4477.17) 3997.01,4683.78 3997.01,4715.54 ccw(c4034.51,4922.15)
  region net $1N3704: 3944.08,4717.9 3962.89,4734.45 ccw(c4012.93,4784.49) 3997.01,4715.54 3962.99,4683.78 ccw(c3894.04,4667.86)
  region net $1N4319: 3589.34,3287.07 3569.34,3287.07 ccw(c3475.15,3287.07) 3564.43,3317.07 3596.18,3317.07 ccw(c3658.5,3287.07)
  region net FP_ENABLE: 3670.5,3340 3670.5,3330 ccw(c3670.5,3311.25) 3655.5,3322.5 3655.5,3347.5 ccw(c3670.5,3358.75)
  region net $1N4319: 3597.96,3243.74 3597.96,3263.74 ccw(c3597.96,3343.27) 3627.96,3269.61 3627.96,3237.86 ccw(c3597.96,3164.21)
  region net VBUS: 4059.64,4717.2 4077.32,4734.88 ccw(c4197.09,4854.65) 4106.81,4711.34 4083.19,4687.71 ccw(c3939.87,4597.43)
  region net VBUS: 4130.36,4681.85 4112.68,4664.17 ccw(c3992.91,4544.4) 4083.19,4687.71 4106.81,4711.34 ccw(c4250.13,4801.62)
  region net $1N3697: 3885.2,4716.65 3902.88,4734.33 ccw(c4017.75,4849.2) 3931.81,4711.34 3908.19,4687.71 ccw(c3770.32,4601.77)
  region net $1N1560: 4538.17,3323.68 4538.17,3333.68 ccw(c4538.17,3352.43) 4553.17,3341.18 4553.17,3316.18 ccw(c4538.17,3304.93)
  region net $1N4315: 3453.2,3271.48 3453.2,3251.48 ccw(c3453.2,3238.26) 3443.95,3247.7 3443.95,3275.26 ccw(c3453.2,3284.7)
  region net $1N4315: 3409.34,3305.26 3429.34,3305.26 ccw(c3467.45,3305.26) 3443.95,3275.26 3394.73,3275.26 ccw(c3371.23,3305.26)
  region net +3.3V: 3376.68,3176.68 3376.68,3196.68 ccw(c3376.68,3241.68) 3394.73,3200.46 3394.73,3172.9 ccw(c3376.68,3131.67)
  region net FP_VCC: 3395.2,3234.08 3395.2,3214.08 ccw(c3395.2,3093.13) 3365.2,3210.3 3365.2,3237.86 ccw(c3395.2,3355.03)
  region net +3.3V: 3382.28,4877.44 3382.28,4897.44 ccw(c3382.28,4964.96) 3412.28,4904.47 3412.28,4872.98 ccw(c3382.28,4774.42)
  region net +3.3V: 3477.72,4898.72 3477.72,4878.72 ccw(c3477.72,4797.56) 3447.72,4872.98 3447.72,4904.47 ccw(c3477.72,4979.89)
  region net BAT_ADC: 3304.8,3687.96 3304.8,3677.96 ccw(c3304.8,3659.21) 3289.8,3670.46 3289.8,3695.46 ccw(c3304.8,3706.71)
  region net GND: 3455.13,3733.06 3448.46,3740.53 ccw(c3427.24,3756.44) 3453.76,3756.44 3465.61,3743.78 ccw(c3923.78,3285.61)
  region net $1N2417: 3373.84,3608.4 3365.64,3602.46 ccw(c3349.73,3581.25) 3349.73,3607.77 3368.54,3624.31 ccw(c3395.05,3624.31)
  region net BAT_ADC: 3337.56,3713.84 3347.56,3713.84 ccw(c3366.31,3713.84) 3355.06,3698.84 3334.52,3698.84 ccw(c3299.02,3713.84)
  region net BAT_ADC: 3319.52,3677.96 3319.52,3687.96 ccw(c3319.52,3706.71) 3334.52,3695.46 3334.52,3670.46 ccw(c3319.52,3659.21)
  region net FP_RX: 3485.53,3863.38 3492.6,3870.45 3493.47,3869.71 3494.45,3869.09 3496.66,3868.16 3499.03,3867.6 3501.38,3867.34 3488.64,3854.6 3488.38,3856.95 3487.82,3859.32 3486.89,3861.53 3486.27,3862.51
  region net FP_TX: 3426.48,3863.38 3433.55,3870.45 3434.42,3869.71 3435.4,3869.09 3437.61,3868.16 3439.98,3867.6 3442.33,3867.34 3429.59,3854.6 3429.33,3856.95 3428.77,3859.32 3427.84,3861.53 3427.22,3862.51
  region net TXD: 3588.59,3980.35 3588.59,3970.35 3587.45,3970.26 3586.32,3970.01 3584.1,3969.1 3582.03,3967.82 3580.19,3966.35 3580.19,3984.36 3582.03,3982.89 3584.1,3981.6 3586.32,3980.7 3587.45,3980.44
  region net BAT+: 4054.16,3413.17 4069.06,3433.62 4069.47,3433.03 4069.7,3432.32 4069.71,3430.61 4069.32,3428.67 4068.76,3426.69 4068.25,3424.84 4068.02,3423.32 4068.08,3422.74 4068.3,3422.31 4068.7,3422.05 4069.31,3421.99 4058.73,3405.85 4057.91,3407.68 4056.76,3409.71 4055.45,3411.64
  region net FP_TOUCH_OUT: 3524.9,3863.02 3531.98,3870.1 3532.84,3869.35 3533.83,3868.73 3536.03,3867.81 3538.41,3867.25 3540.75,3866.98 3528.02,3854.25 3527.75,3856.59 3527.19,3858.97 3526.27,3861.17 3525.65,3862.16
  region net FP_ENABLE: 3738.02,3870.1 3745.1,3863.02 3744.35,3862.16 3743.73,3861.17 3742.81,3858.97 3742.25,3856.59 3741.98,3854.25 3729.25,3866.98 3731.59,3867.25 3733.97,3867.81 3736.17,3868.73 3737.16,3869.35
  region net FP_ENABLE: 3683.65,3330 3683.65,3340 3684.79,3340.09 3685.92,3340.34 3688.14,3341.25 3690.21,3342.53 3692.06,3344.01 3692.06,3325.99 3690.21,3327.47 3688.14,3328.75 3685.92,3329.66 3684.79,3329.91
  region net BTN-PAIR: 3573.74,4326.38 3583.74,4327.09 3583.83,4325.96 3584.09,4324.82 3585.04,4322.58 3586.37,4320.5 3587.9,4318.69 3569.9,4317.97 3571.31,4319.85 3572.54,4321.92 3573.41,4324.11 3573.65,4325.24
  region net BTN-PAIR: 4110,3768.65 4100,3768.65 4099.91,3769.79 4099.66,3770.92 4098.75,3773.14 4097.47,3775.21 4095.99,3777.06 4114.01,3777.06 4112.53,3775.21 4111.25,3773.14 4110.34,3770.92 4110.09,3769.79
  region net GND: 4399.57,3181.45 4392.5,3174.37 4391.63,3175.12 4390.65,3175.74 4388.44,3176.66 4386.07,3177.22 4383.72,3177.49 4396.46,3190.22 4396.72,3187.88 4397.28,3185.5 4398.21,3183.3 4398.83,3182.31
  region net GND: 3415.75,3728.83 3422.82,3721.76 3422.08,3720.89 3421.46,3719.91 3420.54,3717.7 3419.98,3715.33 3419.71,3712.99 3406.98,3725.72 3409.32,3725.99 3411.69,3726.55 3413.9,3727.47 3414.88,3728.09
  region net +3.3V: 3273.47,4279.41 3293.47,4279.41 3293.55,4276.76 3293.78,4274.26 3294.47,4269.88 3295.16,4266.66 3295.47,4265 3271.46,4265 3271.77,4266.66 3272.46,4269.88 3273.15,4274.26 3273.38,4276.76
  region net EN: 3337.51,4288.06 3347.51,4284.29 3347.77,4282.07 3348.44,4279.94 3349.38,4277.88 3350.47,4275.88 3332.86,4279.65 3334.57,4281.29 3336.06,4283.42 3337.11,4285.76 3337.41,4286.94
  region net BOOT: 3691.84,4031.35 3701.84,4031.35 3701.93,4030.21 3702.19,4029.08 3703.1,4026.86 3704.38,4024.79 3705.85,4022.94 3687.84,4022.94 3689.31,4024.79 3690.59,4026.86 3691.5,4029.08 3691.76,4030.21
  region net BOOT: 3628.65,3425 3628.65,3435 3629.79,3435.09 3630.92,3435.34 3633.14,3436.25 3635.21,3437.53 3637.06,3439.01 3637.06,3420.99 3635.21,3422.47 3633.14,3423.75 3630.92,3424.66 3629.79,3424.91
  region net FP_VCC: 3410.59,3214.08 3410.59,3234.08 3413.24,3234.17 3415.74,3234.39 3420.12,3235.08 3423.34,3235.77 3425,3236.09 3425,3212.07 3423.34,3212.38 3420.12,3213.07 3415.74,3213.77 3413.24,3213.99
  region net +3.3V: 3366.57,3154.41 3386.57,3154.41 3386.66,3151.76 3386.88,3149.26 3387.57,3144.88 3388.26,3141.66 3388.58,3140 3364.56,3140 3364.88,3141.66 3365.57,3144.88 3366.26,3149.26 3366.48,3151.76
  region net $1N22263: 4015,3211.35 4025,3211.35 4025.09,3210.21 4025.34,3209.08 4026.25,3206.86 4027.53,3204.79 4029.01,3202.94 4010.99,3202.94 4012.47,3204.79 4013.75,3206.86 4014.66,3209.08 4014.91,3210.21
  region net $1N22267: 4003.65,3135 4003.65,3145 4004.79,3145.09 4005.92,3145.34 4008.14,3146.25 4010.21,3147.53 4012.06,3149.01 4012.06,3130.99 4010.21,3132.47 4008.14,3133.75 4005.92,3134.66 4004.79,3134.91
  region net VBUS: 3811.35,3170 3811.35,3160 3810.21,3159.91 3809.08,3159.66 3806.86,3158.75 3804.79,3157.47 3802.94,3155.99 3802.94,3174.01 3804.79,3172.53 3806.86,3171.25 3809.08,3170.34 3810.21,3170.09
  region net VBUS: 4458.65,3203.34 4451.58,3196.27 ccw(c4380.16,3124.85) 4436.02,3209 4445.92,3218.9 ccw(c4530.07,3274.76)
  region net $1N3697: 3873.33,4805.66 cw(c3649.28,4805.66) 3851.16,4708.5 3868.84,4690.82 cw(c3889.93,4669.46) 3911.16,4690.69 3899.58,4736.69 3898.33,4812.23
  region net +3.3V: 3295,3264.08 cw(c3395,3264.08) 3315,3324.08 3284.82,3334.08 3255,3324.08 cw(c3175,3264.08) 3275,3264.08
  region net +3.3V: 3366.57,3140 ccw(c3322.94,3140) 3346.57,3176.68 3376.68,3186.68 3406.57,3176.68 ccw(c3430.2,3140) 3386.57,3140

## Silkscreen, mask and mechanical layers (free items; w line width, h text height)
Top Silkscreen Layer:
  circle w10: c3905.51,4023.62 r377.95
  lines w10: 3314.96,4429.13 4496.06,4429.13 4496.06,5019.69 3314.96,5019.69 3314.96,4429.13
  text "Li-ion Battery / 951530 / 3.7V 400mAh" at 3600,4470 h98.43
  text "Sensor / ZW101" at 3705,3880 h118.11
Bottom Silkscreen Layer:
  drawing of 17 lines, arcs and shapes, not listed
  text "MYNOVA" at 4780,4340 h120
  text "Sparkin FP01" at 4775,4240 h78.74

## Text inside footprints (layer, text, board x,y; h text height)
H1: Bottom Silkscreen Layer "UART" at 3150,3350 h59.06 r270; Bottom Silkscreen Layer "G" at 3011.27,3370 h59.06 r270; Bottom Silkscreen Layer "B" at 3011.98,3452.11 h59.06 r270; Bottom Silkscreen Layer "E" at 3011.98,3527.95 h59.06 r270; Bottom Silkscreen Layer "R" at 3011.98,3603.79 h59.06 r270; Bottom Silkscreen Layer "T" at 3011.98,3688.22 h59.06 r270; Bottom Silkscreen Layer "V" at 3011.98,3766.93 h59.06 r270
U1: Bottom Silkscreen Layer "ANTENNA" at 3161.41,4515.75 h80 r90